# Altium PCB PCB.PcbDoc
Units mm, origin at the board's own origin, x right, y up, seen from the top; angles counter-clockwise.
Board outline 19.86 x 18.8 mm, 2 copper layers (Top Layer, Bottom Layer); 8 components, 9 nets, 36 pads, 9 vias.
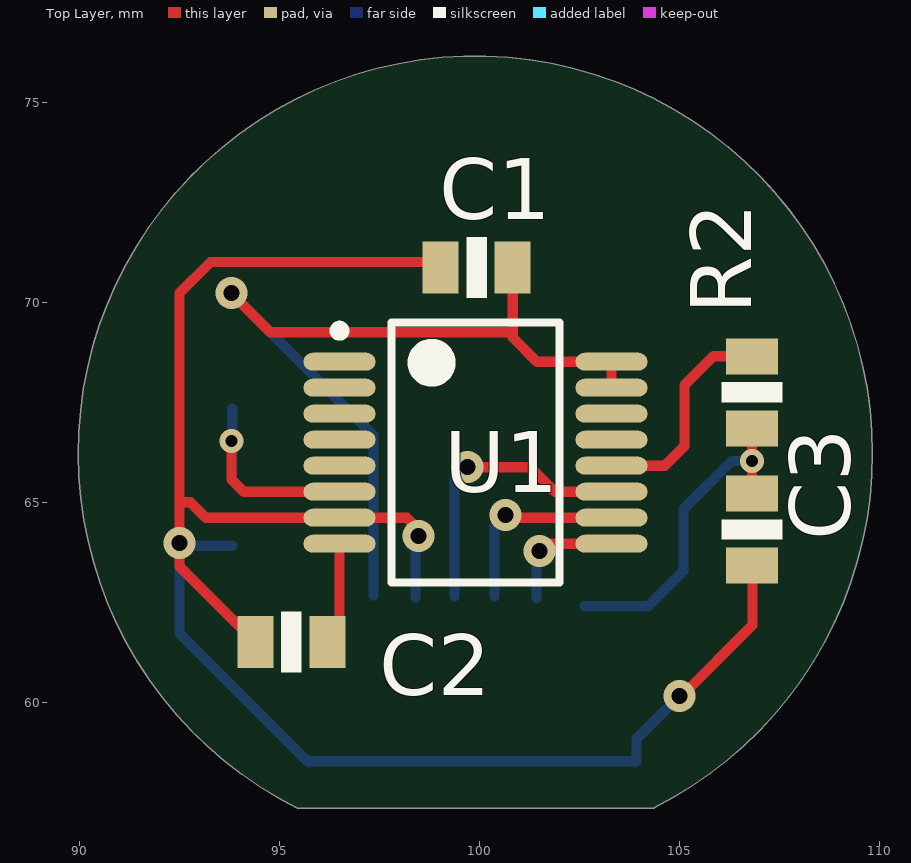
[diagram p0: Top Layer view]
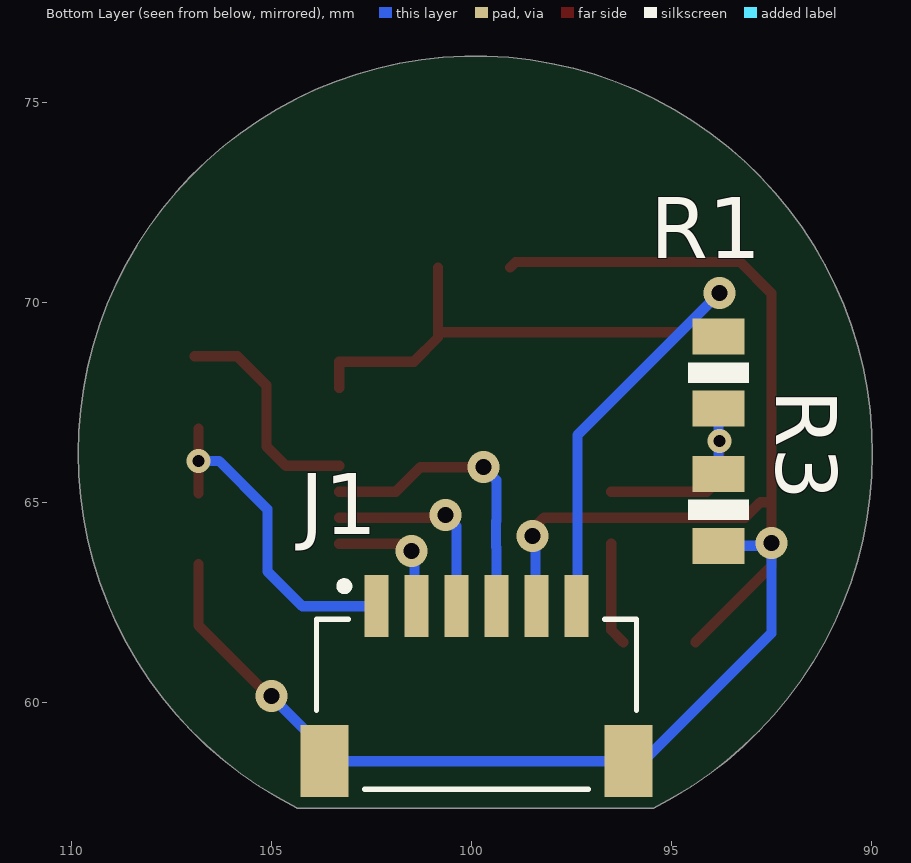
[diagram p1: Bottom Layer view, seen from below]

## Layer stack, top to bottom
Top Solder: solder mask 0.0102, Solder Resist, Dk 3.5
Top Layer: signal copper 0.0356
Dielectric 1: dielectric 0.32, FR-4, Dk 4.8
Bottom Layer: signal copper 0.0356
Bottom Solder: solder mask 0.0102, Solder Resist, Dk 3.5

## Board outline
95.45,57.35 cw(c99.9,66.225) 104.37,57.36 104.37,57.35

## Design rules (kind name [scope] priority, off if disabled: settings)
Clearance [All] p1: gap=0.254 ignorepadtopadclearanceinfootprint=FALSE except(0: Arc-Hole Track-Hole SMDPad-Hole THPad-Hole Via-Hole Fill-Hole Poly-Hole Region-Hole Text-Hole)
PolygonConnect [All] p1: connectstyle=Relief reliefconductorwidth=0.254 reliefentries=4 polygonreliefangle="90 Angle" airgapwidth=0.254
RoutingVias [All] p1: holewidth=0.711 width=1.27 viastyle="Through Hole" minholewidth=0.711 minwidth=1.27 maxholewidth=0.711 maxwidth=1.27
SolderMaskExpansion [All] p1: expansion=0.102
Width [All] p1: maxlimit=0.254 minlimit=0.254 preferedwidth=0.254
30 further rules are at their usual default settings.

## Components (designator, comment, footprint, x,y, rotation, side; value= is the part's Value field where it differs from the comment)
C1 "Cap" _0805 99.933,70.865 r180 top value=100nF
C2 "Cap" _0805 95.3,61.5 r180 top value=100nF
C3 "Cap" _0805 106.82,64.317 r270 top value=100nF
J1 "SM06B-SRSS-TB(LF)(SN)" JST_SM06B-SRSS-TB(LF)(SN) 99.875,62.4 r180 bottom
R1 "Resistor" _0805 93.823,68.24 r270 bottom value=4.7K
R2 "Resistor" _0805 106.82,67.746 r270 top value=4.7K
R3 "Resistor" _0805 93.823,64.811 r270 bottom value=4.7K
U1 "AS504X" AS504X 96.504,68.512 r0 top

## Footprints (in the part's own frame and the unit in brackets; to place one, negate y for a bottom-side part, rotate by r counter-clockwise, add the part's x,y. Pads: shape width x height; smd on the part's side, far side on the other; paste and mask are expansions set on the pad)
_0805 [mm]
  rect 0.9x1.3 smd: 1(-0.9,0) 2(0.9,0)
  silkscreen extent -0.25,-0.76 0.25,0.76
AS504X [mm]
  oval 1.8x0.45 smd: 1(0,0) 2(0,-0.65) 3(0,-1.3) 4(0,-1.95) 5(0,-2.6) 6(0,-3.25) 7(0,-3.9) 8(0,-4.55) 9(6.8,-4.55) 10(6.8,-3.9) 11(6.8,-3.25) 12(6.8,-2.6) 13(6.8,-1.95) 14(6.8,-1.3) 15(6.8,-0.65) 16(6.8,0)
  silkscreen extent -0.12,-5.53 5.5,0.97, body extent 0.6,-5.53 6.2,0.97, height 2
JST_SM06B-SRSS-TB(LF)(SN) [mm]
  rect 0.6x1.55 smd: 1(-2.5,0) 2(-1.5,0) 3(-0.5,0) 4(0.5,0) 5(1.5,0) 6(2.5,0)
  rect 1.2x1.8 smd: S1(-3.8,-3.875) S2(3.8,-3.875)
  silkscreen extent -4,-4.57 4,0.6

## Part data
C1 C2 C3: library part Cap_1
J1: "Connector Header Surface Mount, Right Angle 6 position 0.039 _1.00mm_", Package=None, Digi-Key_Part_Number=455-1806-1-ND, Digi-Key_Purchase_URL=https://www.digikey.com/product-detail/en/jst-sales-america-inc/SM06B-SRSS-TB_LF__SN_/455-1806-1-ND/926877?utm_source=snapeda&utm_medium=aggregator&utm_campaign=symbol, MF="JST Sales", MP=SM06B-SRSS-TB_LF__SN_, SnapEDA_Link=https://www.snapeda.com/parts/SM06B-SRSS-TB%28LF%29%28SN%29/JST%20Sales%20America%20Inc./view-part/554386/?ref=snap

## Via types
v1: diameter 0.8, hole 0.4, Top Layer to Bottom Layer, 7 vias
v2: diameter 0.6, hole 0.3, Top Layer to Bottom Layer, 2 vias

## Nets (pads, with @x,y where several pads share a name; then routed paths per layer and width w, separated by ;. In a path a pad name is that pad's centre, name@x,y a point inside that pad or via, vN(x,y) a via of type N, cw(c..) or ccw(c..) an arc to the next point about the centre after c; other vN are vias at no path point)
CLK: J1.3 U1.10 | length 4.8
  Top Layer w0.254: v1(100.65,64.675) 100.713,64.612 U1.10
  Bottom Layer w0.254: J1.3@100.375,62.65 100.375,64.4 v1(100.65,64.675)
CS: J1.4 U1.11 | length 7.2
  Top Layer w0.254: v1(99.7,65.875) 101.275,65.875 101.888,65.262 U1.11
  Bottom Layer w0.254: J1.4@99.375,62.65 99.375,63.87 99.381,63.877 99.381,64.524 99.375,64.53 99.375,65.55 v1(99.7,65.875)
DO: J1.2 U1.9 | length 3.3
  Top Layer w0.254: v1(101.5,63.775) v1@101.549,63.775 ; v1@101.625,63.925 101.662,63.888 v1@101.549,63.775 ; U1.9@103.309,63.967 U1.9 101.824,63.962 101.637,63.775 v1@101.549,63.775
  Bottom Layer w0.254: J1.2@101.425,62.6 101.425,63.7 v1(101.5,63.775)
GND: C1.2 C2.2 C3.2 J1.5 J1.S1 J1.S2 R3.2 U1.7 | length 46.9
  Top Layer w0.254: C2.2 92.5,63.4 v1(92.5,63.975) 92.5,65 ; v1(98.475,64.15) 98.475,64.325 98.188,64.612 U1.7 93.163,64.612 92.775,65 92.5,65 ; C1.2 98.892,71.006 93.281,71.006 92.5,70.225 92.5,65 ; v1(105,60.15) 105.053,60.15 106.825,61.922 C3.2@106.825,63.45
  Bottom Layer w0.254: R3.2 92.564,63.911 v1(92.5,63.975) 92.5,61.725 95.7,58.525 J1.S2 J1.S1 103.925,58.525 103.925,59.075 v1(105,60.15) ; J1.5@98.4,62.625 98.4,64.075 v1(98.475,64.15)
MODE: R1.2 R3.1 U1.6 | length 5.4
  Top Layer w0.254: v2(93.8,66.525) 93.8,65.575 94.113,65.262 U1.6
  Bottom Layer w0.254: R3.1 R1.2
NetC2_1: C2.1 U1.8 | length 2.6
  Top Layer w0.254: C2.1 96.504,61.804 U1.8
NetR2_1: R2.1 U1.12 | length 5.6
  Top Layer w0.254: U1.12 104.637,65.912 105.125,66.4 105.125,67.925 105.85,68.65 R2.1@106.925,68.65
PWM: C3.1 J1.1 R2.2 | length 8.2
  Top Layer w0.254: C3.1 v2(106.82,66.031) R2.2
  Bottom Layer w0.254: J1.1@102.625,62.4 104.225,62.4 105.1,63.275 105.1,64.825 106.306,66.031 v2(106.82,66.031)
VCC: C1.1 J1.6 R1.1 U1.15 U1.16 | length 21.6
  Top Layer w0.254: v1(93.8,70.225) 94.775,69.25 100.833,69.25 ; C1.1 100.833,69.25 ; U1.15 U1.16 101.438,68.512 100.833,69.117 100.833,69.25
  Bottom Layer w0.254: v1(93.8,70.225) 97.35,66.675 J1.6@97.35,62.675
pads on no net: U1.1 U1.2 U1.3 U1.4 U1.5 U1.13 U1.14

## Silkscreen, mask and mechanical layers (free items; w line width, h text height)
Mechanical 1:
  lines w0.254: 95.45,57.35 cw(c99.9,66.225) 104.37,57.36
  lines w0.3: 95.45,57.35 104.37,57.35